# EAGLE board board (EAGLE 7.4.0)
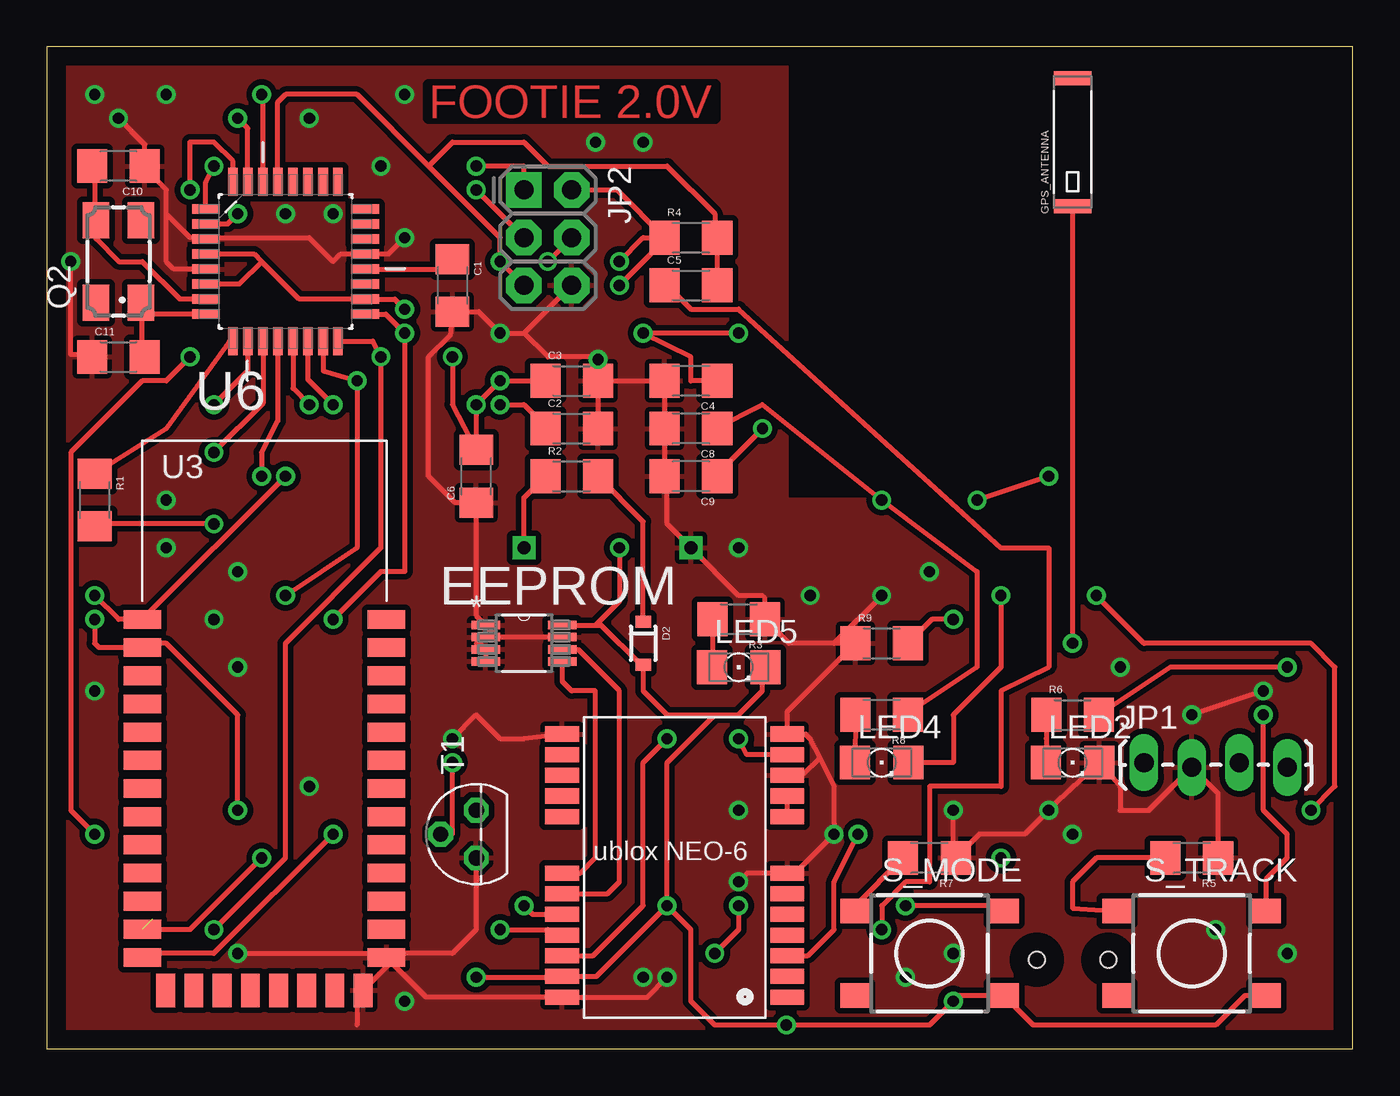
[diagram p0: board, top side]
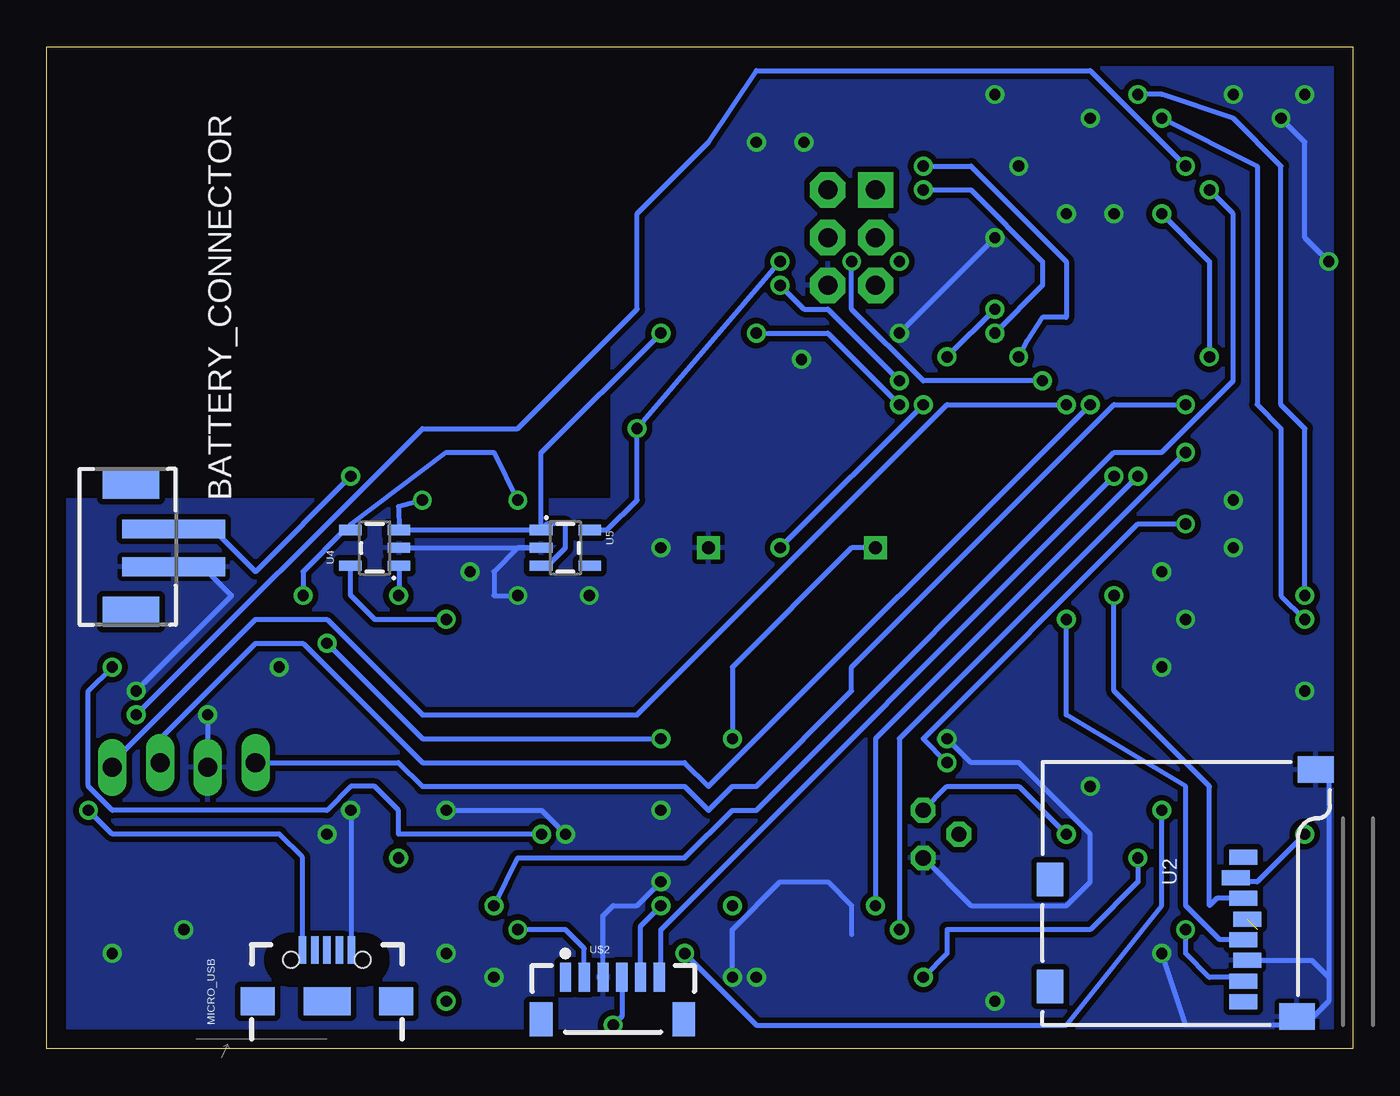
[diagram p1: board, bottom side, seen from below]

Size 69.52 x 53.33 mm. Coordinates in mm from the lower left corner, seen from the top.
Outline: 0,0 69.52,0 69.52,53.33 0,53.33 0,0
Copper layers (1*16): Top 0.035mm / dielectric 1.5mm / Bottom 0.035mm
Design rules "default": minimum track width 10mil, minimum drill 24mil, track to track 8mil, track to pad 8mil, pad to pad 8mil, via to via 8mil, smd to smd 8mil, copper to edge 40mil, drill to drill 8mil, minimum pad ring 10mil, minimum via ring 8mil, stop-mask expansion 4mil, vias tented up to drill 0mil, thermal gap 10mil
Net classes: 1 ground: width 0.508 mm

## Footprints (pad centres in the part's own frame; a part is rotated, then mirrored left to right if it is on the bottom)
JST-2-SMD-VERT = smd 1 x 5.5: GND 1,-2; VCC -1,-2 | smd 1.6 x 3: P$1 -3.4,0.27; P$2 3.4,0.27
1206 = smd 1.6 x 1.8: 1 -1.4,0; 2 1.4,0
SOD-323 = smd 0.63 x 0.83: A 1.15,0; C -1.15,0
SOP65P490X110-8N = smd 1.524 x 0.457: 1 -2.032,0.965; 2 -2.032,0.33; 3 -2.032,-0.33; 4 -2.032,-0.965; 5 2.032,-0.965; 6 2.032,-0.33; 7 2.032,0.33; 8 2.032,0.965
ANTENNA-CHIP6 = smd 0.75 x 2: 1 -3.4,0; NC 3.4,0
1X04_LOCK_LONGPADS = drill 1.016 long: 1 0,0; 2 2.54,-0.254; 3 5.08,0; 4 7.62,-0.254
2X3-NS = drill 1.016 pad 1.88 square: 1 -2.54,-1.27 | drill 1.016 pad 1.88 octagon: 2 -2.54,1.27; 3 0,-1.27; 4 0,1.27; 5 2.54,-1.27; 6 2.54,1.27
LED_1206 = smd 1.6 x 1.803: A -1.422,0; C 1.422,0
USB-B-MICRO-SMD_V03 = smd 1.45 x 0.4: D+1 2.725,0; D-1 2.725,0.65; GND1 2.725,-1.3; ID1 2.725,-0.65; VBUS1 2.725,1.3 | smd 1.5 x 1.8: SHIELD1 0,3.685; SHIELD2 0,-3.685 | smd 1.5 x 2.5: SHIELD3 0,0 | hole 0.85: 2.2,1.9; 2.2,-1.9
CTS406 = smd 1.9 x 1.4: 1 -2.2,-1.2; 2 2.2,-1.2; 3 2.2,1.2; 4 -2.2,1.2
DTSM-6 = smd 1.55 x 1.3: 1 -3.975,2.25; 2 3.975,2.25; 3 -3.975,-2.25; 4 3.975,-2.25
TO92 = drill 0.813 octagon: 1 1.27,0; 2 0,1.905; 3 -1.27,0
MICRO-SD-SOCKET-PP = smd 0.8 x 1.5: 1 -8.94,10.7; 2 -7.84,10.3; 3 -6.74,10.7; 4 -5.64,10.9; 5 -4.54,10.7; 6 -3.44,10.9; 7 -2.34,10.7; 8 -1.24,10.7 | smd 1.8 x 1.4: CD1 -2.05,0.4; CD2 -7.75,0.4 | smd 1.4 x 1.9: GND1 -13.6,14.55; GND3 -0.45,13.55
BLUETOOTH_SMD = smd 2 x 1: 1 0,0; 2 0,-1.5; 3 0,-3; 4 0,-4.5; 5 0,-6; 6 0,-7.5; 7 0,-9; 8 0,-10.5; 9 0,-12; 10 0,-13.5; 11 0,-15; 12 0,-16.5; 13 0,-18; 22 13,-18; 23 13,-16.5; 24 13,-15; 25 13,-13.5; 26 13,-12; 27 13,-10.5; 28 13,-9; 29 13,-7.5; 30 13,-6; 31 13,-4.5; 32 13,-3; 33 13,-1.5; 34 13,0 | smd 1 x 1.8: 14 1.25,-19.75; 15 2.75,-19.75; 16 4.25,-19.75; 17 5.75,-19.75; 18 7.25,-19.75; 19 8.75,-19.75; 20 10.25,-19.75; 21 11.75,-19.75
SOT23-5 = smd 0.55 x 1.2: 1 -0.95,-1.3; 2 0,-1.3; 3 0.95,-1.3; 4 0.95,1.3; 5 -0.95,1.3
QFP80P900X900X120-32N = smd 1.473 x 0.508: 1 -4.242,2.794; 2 -4.242,2.007; 3 -4.242,1.194; 4 -4.242,0.406; 5 -4.242,-0.406; 6 -4.242,-1.194; 7 -4.242,-2.007; 8 -4.242,-2.794; 17 4.242,-2.794; 18 4.242,-2.007; 19 4.242,-1.194; 20 4.242,-0.406; 21 4.242,0.406; 22 4.242,1.194; 23 4.242,2.007; 24 4.242,2.794 | smd 0.508 x 1.473: 9 -2.794,-4.242; 10 -2.007,-4.242; 11 -1.194,-4.242; 12 -0.406,-4.242; 13 0.406,-4.242; 14 1.194,-4.242; 15 2.007,-4.242; 16 2.794,-4.242; 25 2.794,4.242; 26 2.007,4.242; 27 1.194,4.242; 28 0.406,4.242; 29 -0.406,4.242; 30 -1.194,4.242; 31 -2.007,4.242; 32 -2.794,4.242
UBLOX_NEO-6P = smd 1.8 x 0.8: 1_RESERVED 6.4,-7.4; 2_SS_N 6.4,-6.3; 3_TIMEPULSE 6.4,-5.2; 4_EXTINT0 6.4,-4.1; 5_USB_DM 6.4,-3; 6_USB_DP 6.4,-1.9; 7_VDDUSB 6.4,-0.8; 8_RESERVED 6.4,2.2; 9_VCC_RF 6.4,3.3; 10_GND 6.4,4.4; 11_RF_IN 6.4,5.5; 12_GND 6.4,6.6; 13_GND -5.6,6.6; 14_MOSI/CFG_COM0 -5.6,5.5; 15_MISO/CFG_COM1 -5.6,4.4; 16_CFG_CPS0/SCK -5.6,3.3; 17_RESERVED -5.6,2.2; 18_SDA2 -5.6,-0.8; 19_SCL2 -5.6,-1.9; 20_TXD1 -5.6,-3; 21_RXD1 -5.6,-4.1; 22_V_BCKP -5.6,-5.2; 23_VCC -5.6,-6.3; 24_GND -5.6,-7.4
JST-6-SMD-VERT-1.0MM = smd 0.6 x 1.55: 1 -2.54,1.27; 2 -1.54,1.27; 3 -0.54,1.27; 4 0.46,1.27; 5 1.46,1.27; 6 2.46,1.27 | smd 1.2 x 1.8: P$1 -3.84,-0.955; P$2 3.76,-0.955
VL1220 = drill 0.7 pad 0.75 square: 3V 0,0; GND 8.89,0

## Placement (x,y rotation side)
BATTERY_CONNECTOR  3.7v  [JST-2-SMD-VERT]  64.77,26.67 90 bottom
C1  0.1 uF  [1206]  21.59,40.64 270 top
C2  4.7 uF  [1206]  27.94,33.02 0 top
C3  10 uF  [1206]  27.94,35.56 0 top
C4  10 uF  [1206]  34.29,35.56 180 top
C5  0.1 uF  [1206]  34.29,40.64 0 top
C6  0.1 uF  [1206]  22.86,30.48 90 top
C8  4.7 uF  [1206]  34.29,33.02 180 top
C9  4.7 uF  [1206]  34.29,30.48 180 top
C10  22 uF  [1206]  3.81,46.99 180 top
C11  22 uF  [1206]  3.81,36.83 0 top
D2  250mA/100V  [SOD-323]  31.75,21.59 270 top
EEPROM  24LC32A-I/MS  [SOP65P490X110-8N]  25.4,21.59 0 top
GPS_ANTENNA  ANTENNA2SMD6  [ANTENNA-CHIP6]  54.61,48.26 90 top
JP1  [1X04_LOCK_LONGPADS]  58.42,15.24 0 top
JP2  AVR_SPI_PRG_6NS  [2X3-NS]  26.67,43.18 270 top
LED2  [LED_1206]  54.61,15.24 0 top
LED4  [LED_1206]  44.45,15.24 0 top
LED5  [LED_1206]  36.83,20.32 0 top
MICRO_USB  5V  [USB-B-MICRO-SMD_V03]  54.61,2.54 90 bottom
Q2  [CTS406]  3.81,41.91 90 top
R1  100 ohm  [1206]  2.54,29.21 270 top
R2  1K  [1206]  27.94,30.48 0 top
R3  10K  [1206]  36.83,22.86 180 top
R4  10K  [1206]  34.29,43.18 0 top
R5  1K  [1206]  60.96,10.16 180 top
R6  1K  [1206]  54.61,17.78 0 top
R7  1K  [1206]  46.99,10.16 180 top
R8  330  [1206]  44.45,17.78 180 top
R9  2K  [1206]  44.45,21.59 0 top
S_MODE  DTSM-6  [DTSM-6]  46.99,5.08 0 top
S_TRACK  DTSM-6  [DTSM-6]  60.96,5.08 0 top
T1  2N3565  [TO92]  22.86,11.43 90 top
U2  USD-SOCKETNEW  [MICRO-SD-SOCKET-PP]  16.51,1.27 270 bottom
U3  HC_05  [BLUETOOTH_SMD]  5.08,22.86 0 top
U4  MCP73831  [SOT23-5]  52.07,26.67 90 bottom
U5  3.3 regulator  [SOT23-5]  41.91,26.67 270 bottom
U6  ATMEGA328P-AU  [QFP80P900X900X120-32N]  12.7,41.91 0 top
U$1  UBLOX_NEO-6  [UBLOX_NEO-6P]  33.02,10.16 0 top
U$2  JST_VERTICAL  [JST-6-SMD-VERT-1.0MM]  39.37,2.54 0 bottom
U$4  VL1220/HFN  [VL1220]  25.4,26.67 0 top

## Library data of the parts
BATTERY_CONNECTOR JP1 JP2 = SparkFun-Connectors
C1-C6 C8-C11 = SparkFun-Capacitors
D2 = SparkFun-DiscreteSemi; PROD_ID: DIO-09646
EEPROM = Microchip_By_element14_Batch_1; MPN: 24LC32A-I/MS; OC_FARNELL: 1331330; OC_NEWARK: 69K7672; PACKAGE: 8MSOP; SUPPLIER: Microchip
GPS_ANTENNA = SparkFun-RF
LED2 LED4 LED5 = eagle-ltspice; SPICEMODEL: NONE; SPICEPREFIX: D; SPICETYPE: diode
MICRO_USB = SparkFun-Connectors; PROD_ID: CONN-11752
Q2 = crystal; OC_FARNELL: unknown; OC_NEWARK: unknown
R1-R9 = SparkFun-Passives
S_MODE S_TRACK = switch-tact; OC_FARNELL: unknown
T1 = transistor
U2 = SparkFun-Connectors; PROD_ID: CONN-07820
U3 = SerialPortBluetooth
U4 = SparkFun-PowerIC; PROD_ID: IC-09995
U5 = SparkFun-PowerIC; PROD_ID: VREG-00822
U6 = Ava; DESCRIPTION: 8-bit Microcontroller with In-System Programmable Flash; MPN: ATMEGA328P-AU; OC_FARNELL: 1715486; OC_NEWARK: 14R4631; PACKAGE: TQFP-32; SUPPLIER: Atmel
U$1 = Ava
U$2 = SparkFun-Connectors; PROD_ID: CONN-08249
U$4 = footie

## Nets
+3V3: C3.1 C6.2 C9.1 D2.A EEPROM.8 JP2.2 LED5.C R4.1 S_MODE.4 S_TRACK.4 U2.4 U3.12 U5.5 U6.4 U6.6 U6.18 U$1.23_VCC U$2.4
ARDUINO_RX: U3.1 U6.30 U$2.6
ARDUINO_TX: U3.2 U6.31 U$2.5
D2: S_MODE.2 U6.32
D3: S_TRACK.2 U6.1
D5: R1.1 U6.9
D6: JP1.1 U6.10
D9: JP1.3 U6.13
D10: JP1.4 U6.14
DTR: C5.2 JP2.5 R4.2 U6.29
GND [ground]: BATTERY_CONNECTOR.VCC C1.2 C2.2 C3.2 C4.2 C6.1 C8.2 C9.2 C10.1 C11.1 EEPROM.1 EEPROM.2 EEPROM.3 EEPROM.4 EEPROM.7 JP1.2 JP2.6 LED2.C MICRO_USB.GND1 R3.1 R5.1 R7.1 R9.1 T1.3 U2.6 U2.GND1 U2.GND3 U3.21 U3.22 U4.2 U5.2 U6.3 U6.5 U6.21 U$1.7_VDDUSB U$1.10_GND U$1.12_GND U$1.13_GND U$1.24_GND U$2.3 U$4.GND
GPSRX: U6.11 U$1.21_RXD1
GPSTX: U6.12 U$1.20_TXD1
N$1: D2.C R2.2
N$2: C8.1 MICRO_USB.VBUS1 R8.1 U4.4
N$3: R6.2 U$1.3_TIMEPULSE
N$4: LED2.A R6.1
N$5: U$1.8_RESERVED U$1.9_VCC_RF
N$6: R2.1 U$1.22_V_BCKP U$4.3V
N$7: GPS_ANTENNA.1 U$1.11_RF_IN
N$8: LED4.A R8.2
N$9: R7.2 S_MODE.1
N$10: R5.2 S_TRACK.1
N$11: LED4.C U4.1
N$13: C5.1 U$2.2
N$15: R9.2 U4.5
N$16: LED5.A R3.2
N$19: R1.2 T1.2
N$20: T1.1 U3.13
N$22: C1.1 U6.20
N$27: C11.2 Q2.1 U6.8
N$29: C10.2 Q2.3 U6.7
SCL: EEPROM.6 U$1.19_SCL2
SD_CS: U2.2 U6.2
SD_MISO: JP2.1 U2.7 U6.16
SD_MOSI: JP2.4 U2.3 U6.15
SD_SCK: JP2.3 U2.5 U6.17
SDA: EEPROM.5 U$1.18_SDA2
VCC: BATTERY_CONNECTOR.GND C2.1 C4.1 U4.3 U5.1 U5.3

## Tracks (layer width: path | path; a pad name or v marks a point on that pad's centre or on a via)
+3V3  (via drill 0.6)  (1 unrouted)
  Top 0.254: U6.4 11.02,42.32 11.43,41.91 | U6.6 10.24,40.72 11.43,41.91 | 11.43,41.91 13.44,39.9 U6.18 18.52,39.9 v19.05,39.37 | JP2.2 30.35,45.72 R4.1 | S_TRACK.4 63.79,2.83 62.23,1.27 52.52,1.27 S_MODE.4 48.55,2.83 v48.26,2.54 46.99,1.27 v39.37,1.27 35.56,1.27 34.29,2.54 34.29,6.35 v33.02,7.62 | EEPROM.8 29.21,22.55 | 29.21,22.55 29.52,22.55 31.63,20.44 D2.A 31.75,19.05 33.02,17.78 35.56,17.78 | 35.56,17.78 36.83,17.78 38.1,19.05 38.1,20.17 LED5.C | v33.02,7.62 29.26,3.86 U$1.23_VCC 27.37,3.81 v22.86,3.81 | U3.12 7.63,6.36 v11.43,10.16 | v30.48,40.64 33.02,43.18 R4.1 | 26.67,35.56 C3.1 v24.13,35.56 v22.86,34.29 C6.2 21.59,34.29 v21.59,36.83 | v30.48,41.91 31.75,43.18 R4.1 | v38.1,33.02 35.56,30.48 C9.1 | v30.48,26.67 30.48,23.82 29.21,22.55 | v33.02,7.62 33.02,15.24 35.56,17.78
  Bottom 0.254: v24.13,35.56 27.94,39.37 29.21,39.37 v30.48,40.64 | v19.05,39.37 v21.59,36.83 | v30.48,41.91 v38.1,33.02 38.1,29.21 39.69,27.62 U5.5 | v22.86,34.29 v30.48,26.67 | v11.43,10.16 11.43,8.89 13.97,6.35 21.59,6.35 21.59,5.08 v22.86,3.81 | U$2.4 38.91,1.73 v39.37,1.27
ARDUINO_RX  (via drill 0.6)
  Top 0.254: U6.30 11.51,50.72 v11.43,50.8 | v2.54,24.13 3.81,22.86 U3.1 v12.7,30.48
  Bottom 0.254: v2.54,24.13 2.54,33.02 3.81,34.29 3.81,46.99 6.35,49.53 10.16,50.8 v11.43,50.8 | v12.7,30.48 36.83,6.35 36.83,3.81 U$2.6
ARDUINO_TX  (via drill 0.6)
  Top 0.254: U6.31 10.69,49 v10.16,49.53 | v2.54,22.86 2.54,21.59 2.77,21.36 U3.2 5.31,21.59 6.35,21.59 10.16,17.78 v10.16,12.7 | v36.83,7.62 36.83,6.35 v35.56,5.08
  Bottom 0.254: v2.54,22.86 3.81,24.13 3.81,33.02 5.08,34.29 5.08,46.99 v10.16,49.53 | U$2.5 37.91,6.54 v36.83,7.62 | v35.56,5.08 31.75,1.27 15.24,1.27 10.16,7.62 v10.16,12.7
D2  (via drill 0.6)
  Top 0.254: v7.62,45.72 7.62,48.26 8.89,48.26 9.91,47.24 U6.32 | v45.72,7.62 50.8,7.62 S_MODE.2
  Bottom 0.254: v7.62,45.72 6.35,44.45 6.35,35.56 10.16,31.75 12.7,31.75 31.75,12.7 33.02,12.7 35.56,10.16 44.45,10.16 v45.72,7.62
D3  (via drill 0.6)
  Top 0.254: U6.1 8.46,46.15 v8.89,46.99 | S_TRACK.2 64.94,9.05 66.04,10.16 66.04,11.43 64.77,12.7 v64.77,17.78
  Bottom 0.254: v8.89,46.99 13.97,52.07 31.75,52.07 34.29,48.26 38.1,44.45 38.1,39.37 44.45,33.02 49.53,33.02 v64.77,17.78
D5
  Top 0.254: U6.9 9.73,37.67 6.35,33.02 R1.1
D6  (via drill 0.6)
  Top 0.254: U6.10 10.69,36.09 v8.89,34.29
  Bottom 0.254: v8.89,34.29 12.7,34.29 26.67,20.32 26.67,19.05 31.75,13.97 33.02,13.97 34.29,12.7 35.56,13.97 49.53,13.97 50.8,15.24 JP1.1
D9  (via drill 0.6)
  Top 0.254: U6.13 13.11,35.15 v13.97,34.29
  Bottom 0.254: v13.97,34.29 34.29,13.97 35.56,15.24 49.53,15.24 55.88,21.59 58.42,21.59 63.5,16.51 JP1.3
D10  (via drill 0.6)
  Top 0.254: U6.14 13.89,35.64 v15.24,34.29
  Bottom 0.254: v15.24,34.29 21.59,34.29 38.1,17.78 49.53,17.78 54.61,22.86 58.42,22.86 66.04,15.24 JP1.4
DTR  (via drill 0.6)
  Top 0.254: U6.29 12.29,50.39 12.7,50.8 16.51,50.8 20.32,46.99 | C5.2 R4.2 35.56,43.18 35.56,44.45 33.02,46.99 26.67,46.99 25.4,48.26 21.59,48.26 20.32,46.99 | JP2.5 v24.13,41.91 24.13,43.18 20.32,46.99
GND  (via drill 0.6)
  Top 0.254: 6.35,44.45 6.35,45.72 5.08,46.99 C10.1 5.21,48.13 v3.81,49.53 | 6.35,44.45 7.62,43.18 8.89,43.18 | 8.89,43.18 U6.3 | U6.5 6.76,41.5 6.35,41.91 6.35,44.45 | C11.1 2.41,36.96 1.27,36.96 v1.27,41.91 | T1.3 22.86,6.35 21.59,5.08 18.8,5.08 U3.21 16.51,2.54 16.51,1.27 | 8.89,43.18 13.97,43.18 15.24,41.91 15.65,42.32 U6.21 18.19,42.32 v19.05,43.18 | R5.1 62.36,13.59 JP1.2 58.67,12.7 57.15,12.7 57.15,13.97 LED2.C 53.49,12.85 v53.34,12.7 52.07,11.43 49.66,11.43 R7.1 48.26,10.16 v48.26,12.7 | 25.4,38.1 v24.13,38.1 22.99,39.24 C1.2 21.46,37.97 20.32,36.83 20.32,30.48 21.72,29.08 C6.1 22.86,23.06 EEPROM.1 24,21.92 | 25.4,38.1 JP2.6 | C3.2 v29.34,36.7 29.21,36.83 26.67,36.83 25.4,38.1 | C3.2 C2.2 | C3.2 C4.2 C8.2 C9.2 33.02,30.35 33.02,27.94 U$4.GND 36.83,24.13 38.1,24.13 38.23,24 R3.1 39.5,21.59 41.91,21.59 | EEPROM.7 24,21.92 | 24,21.92 EEPROM.2 23.19,21.92 22.86,21.59 23.04,21.59 EEPROM.3 EEPROM.4 | 41.91,21.59 R9.1 39.42,17.96 U$1.12_GND 40.39,16.76 40.64,16.51 41.15,15.49 | v10.16,5.08 17.78,5.08 U3.22 20.18,2.76 U$1.24_GND 31.97,2.76 v33.02,3.81 | v21.59,16.51 22.86,17.78 24.13,16.51 25.4,16.51 U$1.13_GND | v44.45,24.13 41.91,21.59 | v64.77,19.05 v60.96,17.78 | 41.15,15.49 41.91,13.97 v41.91,11.43 39.84,9.36 U$1.7_VDDUSB 37.3,9.36 v36.83,8.89 | U$1.10_GND 40.21,14.56 41.15,15.49
  Bottom 0.254: v1.27,41.91 2.54,43.18 2.54,48.26 v3.81,49.53 | v24.13,38.1 v19.05,43.18 | 2.54,1.27 1.27,2.54 1.27,3.81 | 1.27,3.81 1.27,15.24 U2.GND1 | 2.54,1.27 U2.GND3 3.81,1.27 | v10.16,5.08 8.89,1.27 2.54,1.27 | U2.6 2.17,4.71 1.27,3.81 | v21.59,16.51 20.32,15.24 17.78,15.24 13.97,11.43 13.97,8.89 15.24,7.62 20.32,7.62 T1.3 | v41.91,11.43 43.18,12.7 v48.26,12.7 | MICRO_USB.GND1 53.31,12.67 v53.34,12.7 | U4.2 U5.2 44.45,26.67 45.72,25.4 45.72,24.13 v44.45,24.13 | v33.02,3.81 33.02,6.35 30.48,8.89 27.94,8.89 26.67,7.62 26.67,6.08 | v60.96,17.78 JP1.2 | v64.77,19.05 59.69,24.13 60.96,25.4 62.23,25.4 BATTERY_CONNECTOR.VCC | U$2.3 39.91,7.08 39.37,7.62 38.1,7.62 v36.83,8.89
  other vias: 2.54,50.8 6.35,50.8 13.97,49.53 17.78,46.99 19.05,50.8 29.21,48.26 31.75,48.26 36.83,26.67 40.64,24.13 57.15,20.32 46.99,25.4 6.35,29.21 6.35,26.67 8.89,22.86 10.16,25.4 10.16,20.32 2.54,19.05 13.97,13.97 12.7,44.45 15.24,44.45 19.05,2.54 31.75,3.81 48.26,5.08 45.72,3.81 66.04,5.08 62.23,6.35 54.61,11.43 36.83,12.7
  pour Top (isolate 0.305): 0,53.34 0,0 68.58,0 68.58,27.94 68.58,29.21 39.37,29.21 39.37,53.34
  pour Bottom (isolate 0.305): 0,53.34 0,0 68.58,0 68.58,29.21 39.37,29.21 39.37,30.48 39.37,53.34
GPSRX  (via drill 0.6)
  Top 0.254: U6.11 11.51,34.37 v8.89,31.75 | v24.13,6.35 26.67,6.35 U$1.21_RXD1
  Bottom 0.254: v24.13,6.35 24.13,16.51 v8.89,31.75
GPSTX  (via drill 0.6)
  Top 0.254: U6.12 12.29,33.43 11.43,31.75 v11.43,30.48 | v25.4,7.62 25.86,7.16 U$1.20_TXD1
  Bottom 0.254: v25.4,7.62 25.4,16.51 v11.43,30.48
N$1
  Top 0.254: D2.C 31.75,28.07 R2.2
N$2  (via drill 0.6)
  Top 0.254: R8.1 45.72,17.78 49.53,20.32 49.53,25.4 v44.45,29.21 38.1,34.29 35.56,33.02 C8.1 | v67.31,12.7 68.58,13.97 68.58,20.32 67.31,21.59 58.42,21.59 v55.88,24.13
  Bottom 0.254: v44.45,29.21 45.72,31.75 48.26,31.75 53.37,27.91 U4.4 53.66,27.62 55.88,25.4 v55.88,24.13 | MICRO_USB.VBUS1 55.91,10.19 57.15,11.43 66.04,11.43 v67.31,12.7
N$3  (via drill 0.6)
  Top 0.254: U$1.3_TIMEPULSE 40.52,4.96 41.91,6.35 41.91,8.89 v43.18,11.43 | v66.04,20.32 59.82,20.32 R6.2
  Bottom 0.254: v43.18,11.43 50.8,11.43 50.8,12.7 52.07,13.97 53.34,13.97 54.61,12.7 66.04,12.7 67.31,13.97 67.31,19.05 v66.04,20.32
N$4
  Top 0.254: R6.1 53.21,16.53 LED2.A
N$5
  Top 0.254: U$1.8_RESERVED U$1.9_VCC_RF
N$6  (via drill 0.6)
  Top 0.254: U$4.3V 25.4,29.34 R2.1 | U$1.22_V_BCKP 29.09,4.96 31.75,7.62 31.75,15.24 v33.02,16.51
  Bottom 0.254: U$4.3V 26.67,26.67 33.02,20.32 v33.02,16.51
N$7  (via drill 0.6)
  Top 0.254: GPS_ANTENNA.1 v54.61,21.59 | U$1.11_RF_IN 37.25,15.66 v36.83,16.51
  Bottom 0.254: v54.61,21.59 49.53,16.51 v36.83,16.51
N$8
  Top 0.254: R8.2 LED4.A
N$9
  Top 0.254: S_MODE.1 43.02,7.58 R7.2
N$10
  Top 0.254: R5.2 55.88,10.16 54.61,8.89 54.61,7.5 S_TRACK.1
N$11  (via drill 0.6)
  Top 0.254: v50.8,24.13 50.8,20.32 48.26,17.78 48.26,15.24 LED4.C
  Bottom 0.254: U4.1 50.77,24.16 v50.8,24.13
N$13  (via drill 0.6)
  Top 0.254: v44.45,6.35 44.45,7.62 45.72,8.89 46.99,8.89 46.99,13.97 50.8,13.97 50.8,19.05 53.34,20.32 53.34,26.67 50.8,26.67 36.83,39.37 34.29,39.37 33.02,40.64 C5.1
  Bottom 0.254: U$2.2 40.91,5.35 41.91,6.35 v44.45,6.35
N$15  (via drill 0.6)
  Top 0.254: v48.26,22.86 47.12,22.86 R9.2
  Bottom 0.254: U4.5 53.37,24.16 52.07,22.86 v48.26,22.86
N$16
  Top 0.254: R3.2 35.43,20.34 LED5.A
N$19  (via drill 0.6)
  Top 0.254: v8.89,27.94 2.54,27.94 R1.2 | v21.59,15.24 21.59,11.43 T1.2
  Bottom 0.254: v8.89,27.94 11.43,27.94 22.86,16.51 v21.59,15.24
N$20  (via drill 0.6)
  Top 0.254: v15.24,11.43 8.89,5.08 5.08,5.08 U3.13
  Bottom 0.254: v15.24,11.43 17.78,13.97 21.59,13.97 T1.1
N$22
  Top 0.254: U6.20 21.05,41.5 C1.1
N$27
  Top 0.254: 5.08,39.37 5.08,36.83 C11.2 | 5.08,39.37 Q2.1 5.08,39.64 5.08,39.37 | U6.8 5.33,39.12 5.08,39.37
N$29
  Top 0.254: C10.2 2.54,46.99 2.54,44.45 Q2.3 2.61,43.11 3.81,41.91 5.08,41.91 7.09,39.9 U6.7
N$49  (via drill 0.6)
  other vias: 50.8,10.16
SCL
  Top 0.254: EEPROM.6 28.27,21.26 30.48,19.05 30.48,8.89 29.85,8.26 U$1.19_SCL2
SD_CS  (via drill 0.6)
  Top 0.254: U6.2 9.63,43.92 v10.16,44.45 | v2.54,11.43 1.27,12.7 1.27,31.75 5.08,35.56 6.35,35.56 v7.62,36.83
  Bottom 0.254: v2.54,11.43 5.08,8.89 6.35,8.89 U2.2 | v7.62,36.83 7.62,41.91 v10.16,44.45
SD_MISO  (via drill 0.6)
  Top 0.254: U6.16 17.35,37.67 v17.78,36.83 17.78,26.67 12.7,21.59 12.7,10.16 v8.89,6.35 | JP2.1 25.4,46.99 v22.86,46.99
  Bottom 0.254: v22.86,46.99 20.32,46.99 15.24,41.91 15.24,38.94 16.51,38.94 17.35,37.67 v17.78,36.83 | v8.89,6.35 8.89,5.08 7.62,3.81 6.35,3.81 U2.7
SD_MOSI  (via drill 0.6)
  Top 0.254: U6.15 14.71,36.09 v16.51,35.56 16.51,26.67 v12.7,24.13 | v26.67,41.91 JP2.4
  Bottom 0.254: v26.67,41.91 26.67,39.37 22.86,35.56 v16.51,35.56 | U2.3 7.23,8.01 7.62,7.62 7.62,13.97 12.7,19.05 v12.7,24.13
SD_SCK  (via drill 0.6)
  Top 0.254: JP2.3 v22.86,45.72 | U6.17 18.03,39.12 v19.05,38.1 19.05,25.4 17.78,25.4 v15.24,22.86
  Bottom 0.254: v22.86,45.72 20.32,45.72 16.51,41.91 16.51,40.64 v19.05,38.1 | U2.5 7.08,5.81 8.89,7.62 8.89,13.97 15.24,17.78 v15.24,22.86
SDA
  Top 0.254: EEPROM.5 27.43,19.56 27.94,19.05 29.21,19.05 29.21,10.16 28.41,9.36 U$1.18_SDA2
VCC  (via drill 0.6)
  Top 0.254: v24.13,34.29 25.4,34.29 26.67,33.02 C2.1 | C4.1 35.56,35.56 34.29,35.56 34.29,36.83 v31.75,38.1 v36.83,38.1 | v53.34,30.48 v49.53,29.21
  Bottom 0.254: v24.13,34.29 27.94,38.1 v31.75,38.1 | U5.1 U4.3 50.8,28.86 v49.53,29.21 | U5.1 43.21,31.72 v36.83,38.1 | U5.3 42.86,25.72 41.91,26.67 41.91,27.94 42.89,27.94 U5.1 | v53.34,30.48 58.42,25.4 60.96,27.94 62.23,27.94 BATTERY_CONNECTOR.GND

## Text on the board
Top: FOOTIE 2.0V